# Altium PCB Mazzoleni.PcbDoc
Units mm, origin at the board's own origin, x right, y up, seen from the top; angles counter-clockwise.
Board outline 40 x 88.69 mm, 4 copper layers (Top Layer, Inner 1, Inner 2, Bottom Layer), stack 0.021 mm thick; 8 components, 3 nets, 18 pads, 14 vias.
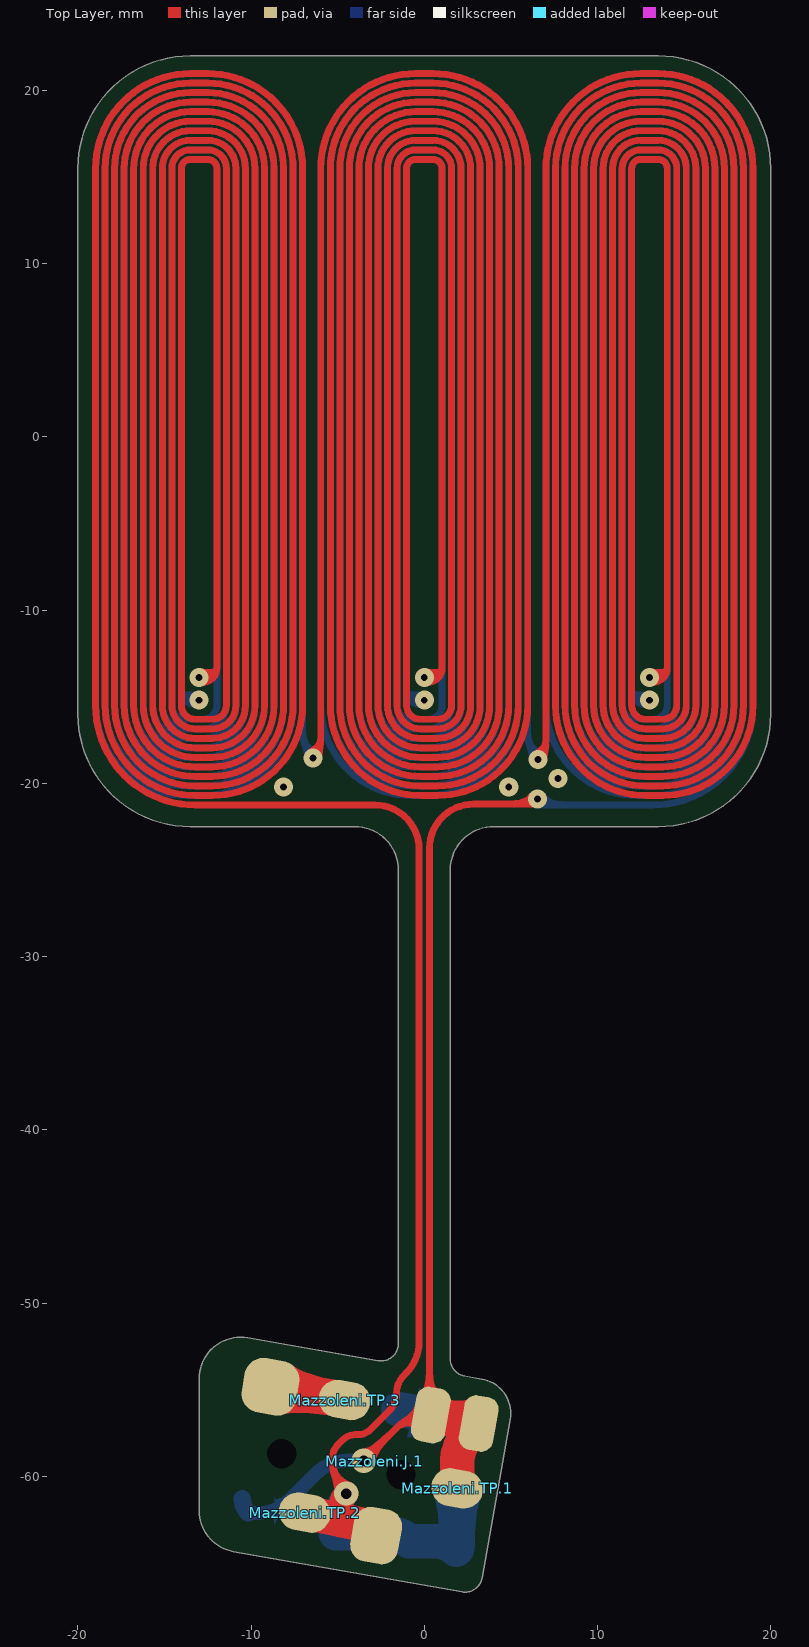
[diagram p0: Top Layer view]
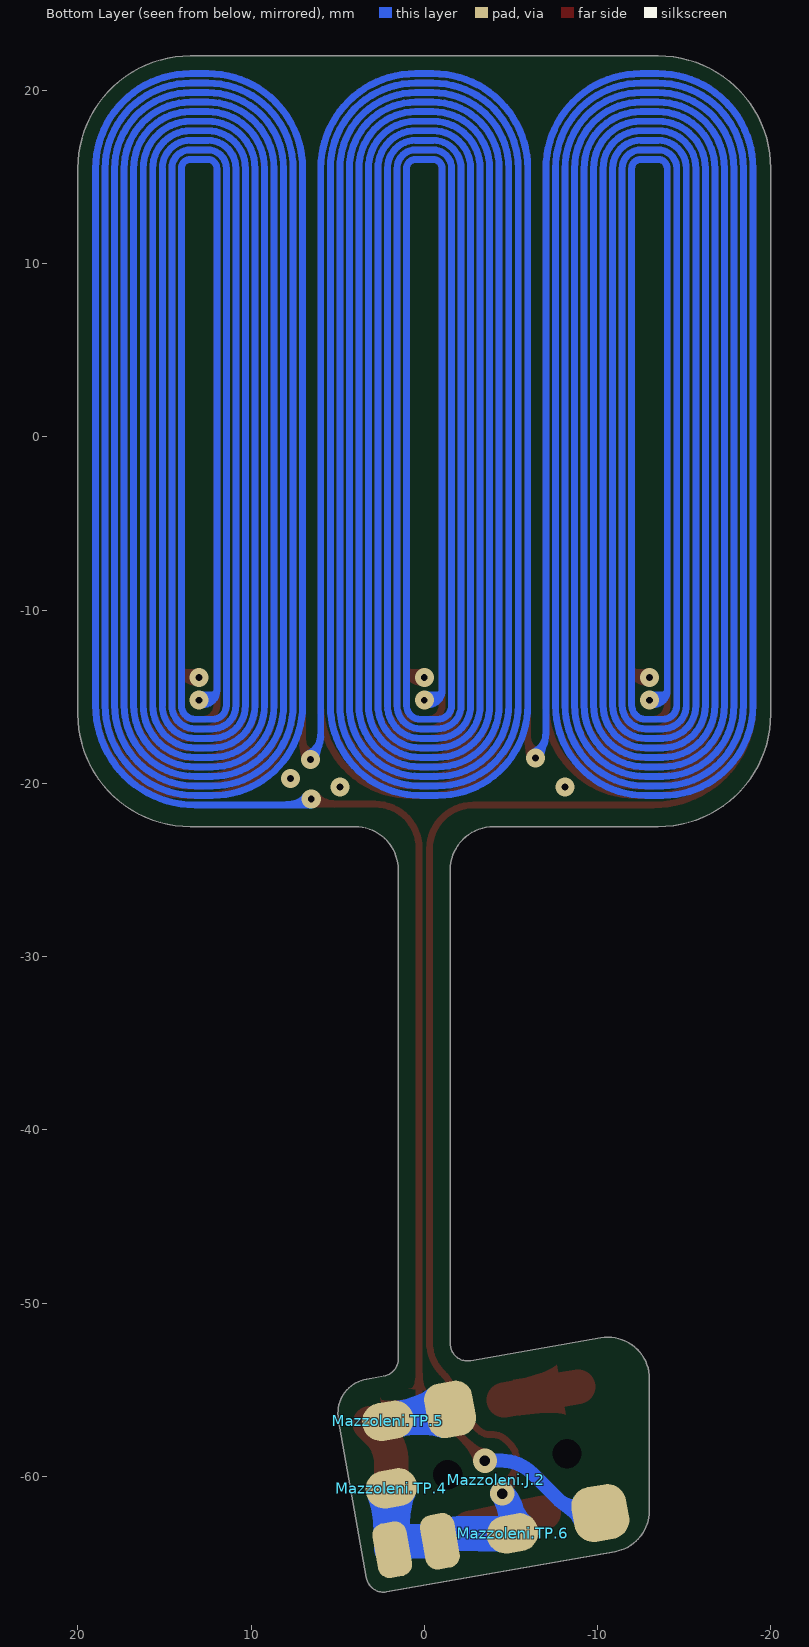
[diagram p1: Bottom Layer view, seen from below]
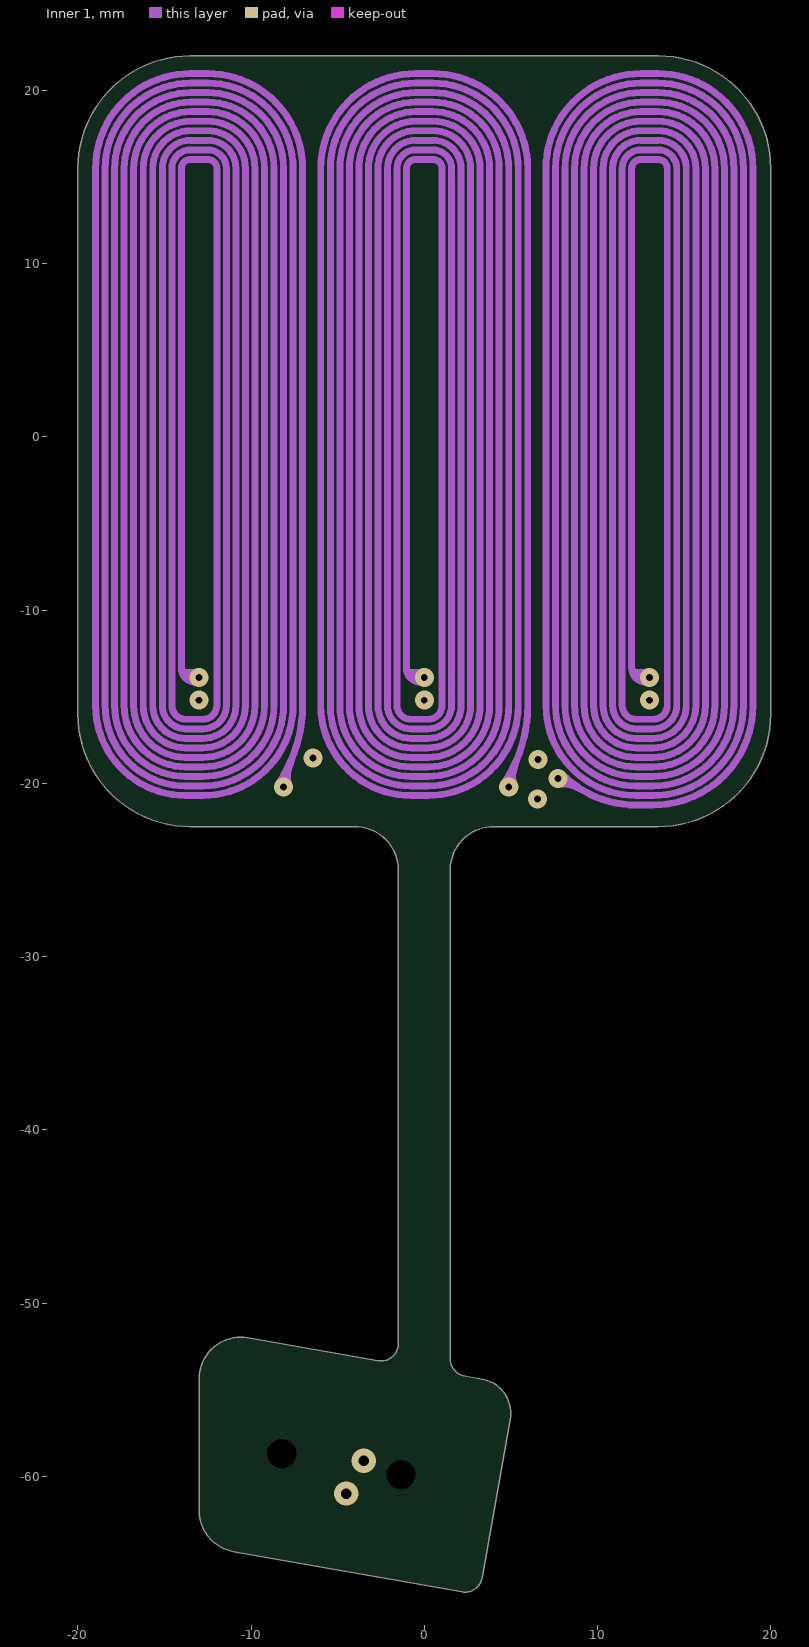
[diagram p2: Inner 1]
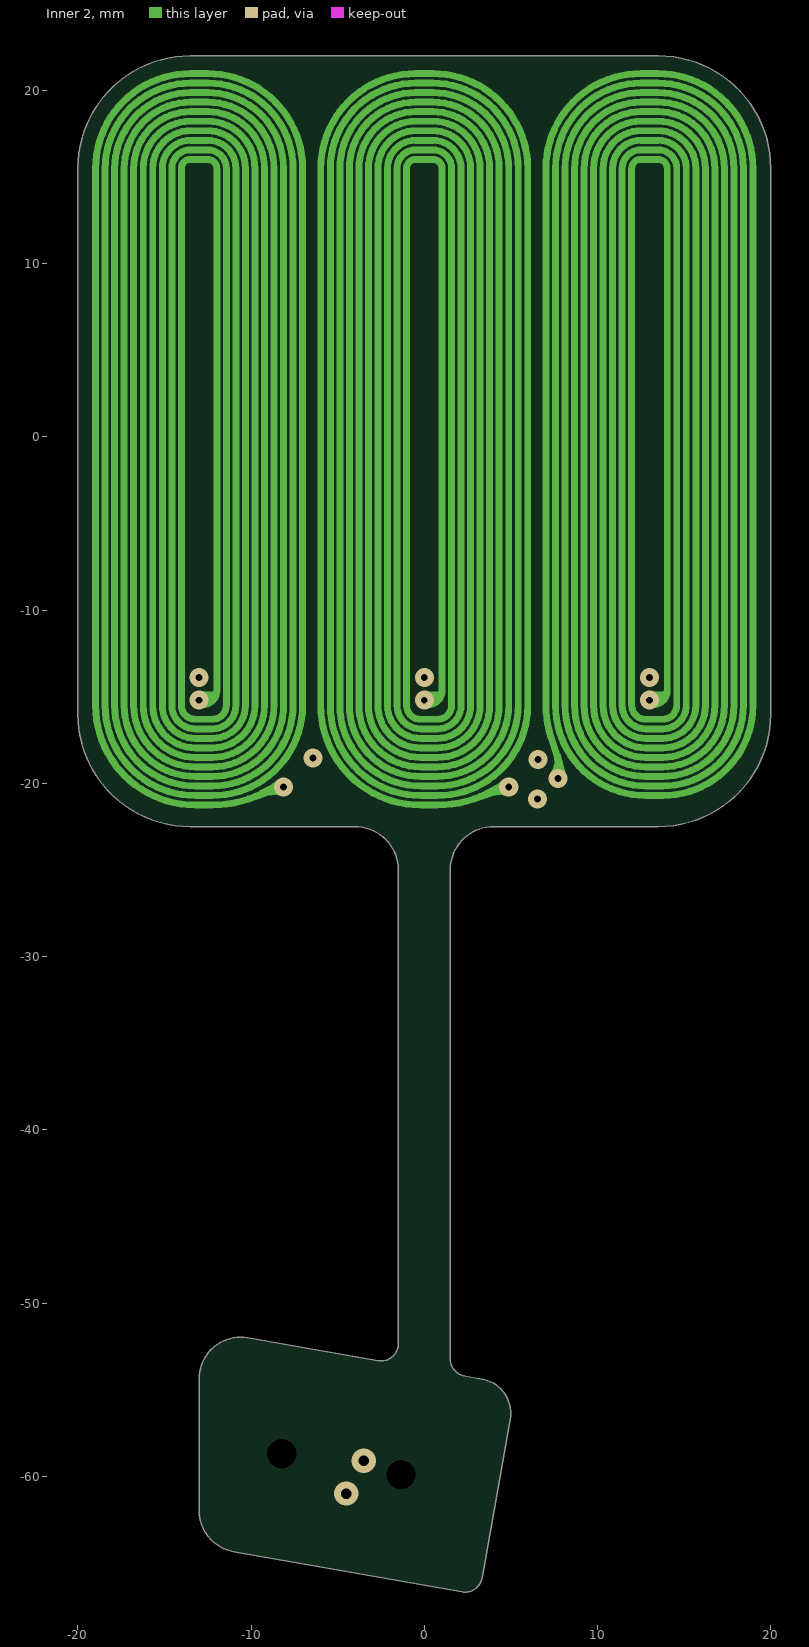
[diagram p3: Inner 2]

## Layer stack, top to bottom
Top Coverlay: solder mask 0.001, Solder Resist, Dk 0
Top Layer: signal copper 0.0045
Dielectric 4: core 0.001, Dk 0
Inner 1: signal copper 0.0045
Dielectric 1: core 0.001, PP-006, Dk 0
Inner 2: signal copper 0.0045
Dielectric 2: core 0.001, PP-006, Dk 0
Bottom Layer: signal copper 0.0045
Bottom Coverlay: solder mask 0.001, Solder Resist, Dk 0

## Board outline
-12.992,-61.987 ccw(c-10.592,-61.987) -11.009,-64.351 2.18,-66.677 ccw(c2.354,-65.692) 3.339,-65.865 3.341,-65.866 4.956,-56.707 ccw(c2.986,-56.36) 3.333,-54.39 2.326,-54.213 cw(c2.5,-53.228) 1.5,-53.228 1.5,-25 cw(c4,-25) 4,-22.5 13.5,-22.5 ccw(c13.5,-16) 20,-16 20,15.5 ccw(c13.5,15.5) 13.5,22 -13.5,22 ccw(c-13.5,15.5) -20,15.5 -20,-16 ccw(c-13.5,-16) -13.5,-22.5 -4,-22.5 cw(c-4,-25) -1.5,-25 -1.5,-52.346 cw(c-2.5,-52.346) -2.674,-53.331 -10.183,-52.007 -10.183,-52.006 ccw(c-10.6,-54.37) -13,-54.37 -13,-61.8

## Design rules (kind name [scope] priority, off if disabled: settings)
BoardOutlineClearance [(Not HasFootprint('SPARKGAP'))] p1: gap=0.4 ignorepadtopadclearanceinfootprint=FALSE except(0: Arc-SplitBarrior Arc-SplitContinuation Track-SplitBarrior Track-SplitContinuation Fill-SplitBarrior Fill-SplitContinuation Poly-SplitBarrior Poly-SplitContinuation Region-SplitBarrior Region-SplitContinuation Text-SplitBarrior Text-SplitContinuation)
Clearance "HighV Pads" [(InNetClass('HighV') AND (IsPad OR IsVia)) vs IsPad OR IsVia] p1: gap=0.4 ignorepadtopadclearanceinfootprint=FALSE except(0: Arc-Hole Track-Hole SMDPad-Hole THPad-Hole Via-Hole Fill-Hole Poly-Hole Region-Hole Text-Hole) // Establishes minimum clearance between bare pads that are high voltage, per IPC2221A Table 6-1, 51-100V, condition A6
Clearance Inter-Pad [IsPad vs IsPad] p2: gap=0.2 ignorepadtopadclearanceinfootprint=FALSE except(0: Arc-Hole Track-Hole SMDPad-Hole THPad-Hole Via-Hole Fill-Hole Poly-Hole Region-Hole Text-Hole)
Clearance "Spark Gaps" [InNetClass('Spark Gap') vs InNet('GND') And InPoly] p3: gap=0.635 ignorepadtopadclearanceinfootprint=FALSE except(0: Arc-Hole Track-Hole SMDPad-Hole THPad-Hole Via-Hole Fill-Hole Poly-Hole Region-Hole Text-Hole)
Clearance FIDs [Name like 'FID*'] p4: gap=1.016 ignorepadtopadclearanceinfootprint=FALSE except(0: Arc-Hole Track-Hole SMDPad-Hole THPad-Hole Via-Hole Fill-Hole Poly-Hole Region-Hole Text-Hole)
Clearance "Inner Planes" [InPoly AND OnMid] p5: gap=0.3 ignorepadtopadclearanceinfootprint=FALSE except(0: Arc-Hole Track-Hole SMDPad-Hole THPad-Hole Via-Hole Fill-Hole Poly-Hole Region-Hole Text-Hole; 0.15: Arc-Arc Arc-Track Track-Track) // Defines a larger clearance for planes on inner layers.
Clearance "All Planes" [InPoly] p6: gap=0.1 ignorepadtopadclearanceinfootprint=FALSE // Defines minimum clearance between planes on the same layer.
Clearance "Inner Layer Clearance" [OnMid vs OnMid] p7: gap=0.3 ignorepadtopadclearanceinfootprint=FALSE except(0: Arc-Hole Track-Hole SMDPad-Hole THPad-Hole Via-Hole Fill-Hole Poly-Hole Region-Hole Text-Hole; 0.15: Arc-Arc Arc-Track Track-Track) // We will give inner layers more spacing because they tend to be subject to stricter process limits.
Clearance [All] p8: gap=0 ignorepadtopadclearanceinfootprint=FALSE except(0.15: Arc-Arc Arc-Track Track-Track; 0.2: Arc-SMDPad Arc-THPad Arc-Via Arc-Text Arc-Hole Track-SMDPad Track-THPad Track-Via Track-Text Track-Hole SMDPad-SMDPad SMDPad-THPad SMDPad-Via SMDPad-Text SMDPad-Hole THPad-THPad THPad-Via THPad-Text THPad-Hole Via-Via Via-Text Fill-Text Poly-Text Region-Text Text-Text Text-Hole)
ComponentClearance "Terminal Block" [(HasFootprint('Phoenix 1933189 - Header')) vs (HasFootprint('Phoenix 1933189 - Header'))] p1: gap=-2.286 collisioncheckmode=3 verticalgap=0.254 showdistances=FALSE
ComponentClearance "FET/TP self Clearance" [(Name like 'Q*') Or (Name like 'TP*') vs (Name like 'Q*') Or (Name like 'TP*')] p2: gap=0.254 collisioncheckmode=3 verticalgap=0.254 showdistances=FALSE
ComponentClearance [Not ((Name like 'H*') Or (Name like 'FID*') Or (Name like 'SP*')) vs Not ((Name like 'H*') Or (Name like 'FID*') Or (Name like 'SP*'))] p3: gap=0.5 collisioncheckmode=3 verticalgap=0.5 showdistances=FALSE
DiffPairsRouting [All] p1: maxlimit=0.508 minlimit=0.279 mostfreqgap=0.381 toplayer_prefgap=0.279 toplayer_minwidth=0.279 toplayer_maxwidth=0.508 toplayer_prefwidth=0.381 midlayer1_mingap=0.305 midlayer1_minwidth=0.305 midlayer1_maxwidth=0.508 midlayer1_prefwidth=0.381 midlayer2_mingap=0.305 midlayer2_minwidth=0.305 midlayer2_maxwidth=0.508 midlayer2_prefwidth=0.381 bottomlayer_prefgap=0.279 bottomlayer_minwidth=0.279 bottomlayer_maxwidth=0.508 bottomlayer_prefwidth=0.381 maxuncoupledlength=12.7
Height [All] p1: minheight=0 maxheight=41 prefheight=12.7
HoleSize [All] p1: absolutevalues=TRUE maxlimit=100 minlimit=0.3 maxpercent=80.000 minpercent=20.000
HoleToHoleClearance [All] p1: gap=0.6 allowstackedmicrovias=TRUE
LayerPairs [All] p1: enforce=FALSE
MinimumSolderMaskSliver [All] p1: minsoldermaskwidth=0.09
NetAntennae [Not (HasFootprint('BALANCE_RESISTOR'))] p1: netantennaetolerance=0
PasteMaskExpansion [All] p1: expansion=-0.025
PlaneClearance [All] p1: clearance=0.3
PlaneConnect [All] p1: pad.planeconnectstyle=Relief pad.reliefexpansion=0.5 pad.reliefentries=4 pad.reliefconductorwidth=0.5 pad.reliefairgap=0.25 via.planeconnectstyle=Direct via.reliefexpansion=0.5 via.reliefentries=4 via.reliefconductorwidth=0.5 via.reliefairgap=0.25
PolygonConnect "PolygonConnect Spark Gap" [HasFootprint('SparkGap')] p1: connectstyle=Direct reliefconductorwidth=0.254 reliefentries=4 polygonreliefangle="90 Angle" airgapwidth=0.254 // This rule makes it so spark gaps get direct connections to ground planes.
PolygonConnect PolygonConnect_GND [All vs InNet('GND')] p2: connectstyle=Direct reliefconductorwidth=0.5 reliefentries=4 polygonreliefangle="90 Angle" airgapwidth=0.25 // This rule specifies all vias and holes connected to a GND plane have direct connections.
PolygonConnect [All] p3: connectstyle=Direct reliefconductorwidth=0.5 reliefentries=4 polygonreliefangle="90 Angle" airgapwidth=0.25
RoutingCorners [All] p1: cornerstyle=45-Degree minsetback=2.5 maxsetback=25
RoutingVias [All] p1: holewidth=0.5 width=1 viastyle="Through Hole" minholewidth=0.2 minwidth=0.5 maxholewidth=5 maxwidth=6
ShortCircuit [Not (InPadClass('TraceResistorPads')) vs Not (InPadClass('TraceResistorPads'))] p1: allowed=FALSE
SilkToBoardRegionClearance [All] p1 off:
SilkToSilkClearance [All] p1 off: silktosilkclearance=0.254
SilkToSolderMaskClearance SilkscreenOverComponentPads [IsPad] p1: minsilkscreentomaskgap=0.102 clearancetoexposedcopper=FALSE
SolderMaskExpansion [All] p1: expansion=0.076 istentingtop=FALSE
Width [All] p1: maxlimit=50.8 minlimit=0.2 preferedwidth=0.4 midlayer1_minwidth=0.35 midlayer2_minwidth=0.35 minimp=50.000000 maximp=50.000000 favimp=50.000000 // Gold Phoenix Flex PCB
14 further rules are at their usual default settings.

## Components (designator, comment, footprint, x,y, rotation, side; value= is the part's Value field where it differs from the comment)
Mazzoleni.J.1 "SJ-43514-SMT-TR" SJ-43514-SMT-TR -4.3,-59.4 r170 top locked (schematic designator J1)
Mazzoleni.J.2 "SJ-43514-SMT-TR" SJ-43514-SMT-TR -4.3,-59.4 r170 bottom locked (schematic designator J2)
Mazzoleni.TP.1 "FlexSolderPad" FlexSolderPad 1.9,-60.7 r260 top (schematic designator TP1)
Mazzoleni.TP.2 "FlexSolderPad" FlexSolderPad -6.9,-62.1 r260 top locked (schematic designator TP2)
Mazzoleni.TP.3 "FlexSolderPad" FlexSolderPad -4.6,-55.6 r260 top (schematic designator TP3)
Mazzoleni.TP.4 "FlexSolderPad" FlexSolderPad 1.9,-60.7 r80 bottom (schematic designator TP4)
Mazzoleni.TP.5 "FlexSolderPad" FlexSolderPad 2.1,-56.8 r80 bottom (schematic designator TP5)
Mazzoleni.TP.6 "FlexSolderPad" FlexSolderPad -5.1,-63.3 r80 bottom locked (schematic designator TP6)

## Footprints (in the part's own frame and the unit in brackets; to place one, negate y for a bottom-side part, rotate by r counter-clockwise, add the part's x,y. Pads: shape width x height; smd on the part's side, far side on the other; paste and mask are expansions set on the pad)
FlexSolderPad [mm]
  oval 2.2x3 smd paste-99 mask-0.5: 1(0,0)
SJ-43514-SMT-TR [mm] "3.50mm (0.141\", 1/8\", Mini Plug) - Headphone Phone Jack Stereo (4 Conductor, TRRS) Connector Solder"
  rrect70% 2x3.2 smd paste-0.05: 1(-6.9,-3.7) 4(-4.1,-3.7)
  rrect70% 3.2x3.2 smd paste-0.05: 2(5.3,-3.7)
  rrect70% 2.8x3.2 smd paste-0.05: 3(-2.2,3.7)
  round 0 hole 1.7: 22(-3,0) 22(4,0)
  body extent -9.2,-4.5 8,4.5, height 5.1

## Part data
Mazzoleni.J.1 Mazzoleni.J.2: "3.50mm (0.141\", 1/8\", Mini Plug) - Headphone Phone Jack Stereo (4 Conductor, TRRS) Connector Solder", Supplier Part Number 1=CP-43514SJCT-ND, Supplier 1=Digi-Key, Supplier 2=Mouser, Supplier Part Number 2=490-SJ-43514-SMT-TR
Mazzoleni.TP.1 Mazzoleni.TP.2 Mazzoleni.TP.3 Mazzoleni.TP.4 Mazzoleni.TP.5 Mazzoleni.TP.6: "Pad designed for soldering a wire to a flex PCB. Reinforced for durability."

## Via types
v1: diameter 1.1, hole 0.4, Top Layer to Bottom Layer, tented both sides, 12 vias
v2: diameter 1.4, hole 0.6, Top Layer to Bottom Layer, tented both sides, 2 vias

## Nets (pads, with @x,y where several pads share a name; then routed paths per layer and width w, separated by ;. In a path a pad name is that pad's centre, name@x,y a point inside that pad or via, vN(x,y) a via of type N, cw(c..) or ccw(c..) an arc to the next point about the centre after c; other vN are vias at no path point)
NetMazzoleni.J.1_1: Mazzoleni.J.1.1 Mazzoleni.J.1.3 Mazzoleni.J.1.4 Mazzoleni.J.2.1 Mazzoleni.J.2.2 Mazzoleni.J.2.4 Mazzoleni.TP.1.1 Mazzoleni.TP.2.1 Mazzoleni.TP.4.1 Mazzoleni.TP.6.1 | length 10042.8
  Top Layer w0.4: -16.775,15.5 -16.775,-15.5 ccw(c-13.225,-15.5) -13.225,-19.05 -12.225,-19.05 ccw(c-12.225,-15.5) -8.675,-15.5 -8.675,15.5 ccw(c-12.5,15.5) -12.5,19.325 -13.5,19.325 ccw(c-13.5,15.5) -17.325,15.5 -17.325,-15.5 ccw(c-13.225,-15.5) -13.225,-19.6 -12.225,-19.6 ccw(c-12.225,-15.5) -8.125,-15.5 -8.125,15.5 ccw(c-12.5,15.5) -12.5,19.875 -13.5,19.875 ccw(c-13.5,15.5) -17.875,15.5 -17.875,-15.5 ccw(c-13.225,-15.5) -13.225,-20.15 -12.225,-20.15 ccw(c-12.225,-15.5) -7.575,-15.5 -7.575,15.5 ccw(c-12.5,15.5) -12.5,20.425 -13.5,20.425 ccw(c-13.5,15.5) -18.425,15.5 -18.425,-15.5 ccw(c-13.225,-15.5) -13.225,-20.7 -12.225,-20.7 ccw(c-12.225,-15.5) -7.025,-15.5 -7.025,15.5 ccw(c-12.5,15.5) -12.5,20.975 -13.5,20.975 ccw(c-13.5,15.5) -18.975,15.5 -18.975,-15.5 ccw(c-13.225,-15.5) -13.225,-21.25 -2.84,-21.25 cw(c-2.84,-23.79) -0.3,-23.79 -0.3,-52.248 cw(c-2.84,-52.248) -1.044,-54.044 -1.176,-54.176 ccw(c-0.151,-55.2) -1.6,-55.2 cw(c-3.049,-55.2) -2.024,-56.224 ; -16.772,15.5 cw(c-13.497,15.5) -13.5,18.775 -12.5,18.775 ; v1@-12.775,-14.15 ccw(c-12.775,-13.35) -11.975,-13.35 -11.975,15.5 ccw(c-12.5,15.5) -12.5,16.025 -13.5,16.025 ccw(c-13.5,15.5) -14.025,15.5 -14.025,-15.5 ccw(c-13.225,-15.5) -13.225,-16.3 -12.225,-16.3 ccw(c-12.225,-15.5) -11.425,-15.5 -11.425,15.5 ccw(c-12.5,15.5) -12.5,16.575 -13.5,16.575 ccw(c-13.5,15.5) -14.575,15.5 -14.575,-15.5 ccw(c-13.225,-15.5) -13.225,-16.85 -12.225,-16.85 ccw(c-12.225,-15.5) -10.875,-15.5 -10.875,15.5 ccw(c-12.5,15.5) -12.5,17.125 -13.5,17.125 ccw(c-13.5,15.5) -15.125,15.5 -15.125,-15.5 ccw(c-13.225,-15.5) -13.225,-17.4 -12.225,-17.4 ccw(c-12.225,-15.5) -10.325,-15.5 -10.325,15.5 ccw(c-12.5,15.5) -12.5,17.675 -13.5,17.675 ccw(c-13.5,15.5) -15.675,15.5 -15.675,-15.5 ccw(c-13.225,-15.5) -13.225,-17.95 -12.225,-17.95 ccw(c-12.225,-15.5) -9.775,-15.5 -9.775,15.5 ccw(c-12.5,15.5) -12.5,18.225 -13.5,18.225 ccw(c-13.5,15.5) -16.225,15.5 -16.225,-15.5 ccw(c-13.225,-15.5) -13.225,-18.5 -12.225,-18.5 ccw(c-12.225,-15.5) -9.225,-15.5 -9.225,15.497 ccw(c-12.5,15.497) -9.225,15.5 ccw(c-12.5,15.497) -12.5,18.772 ; v1(-6.425,-18.525) ccw(c-7.511,-17.439) -5.975,-17.439 -5.975,15.5 cw(c-0.5,15.5) -0.5,20.975 0.5,20.975 cw(c0.5,15.5) 5.975,15.5 5.975,-15.5 cw(c0.775,-15.5) 0.775,-20.7 -0.225,-20.7 cw(c-0.225,-15.5) -5.425,-15.5 -5.425,15.5 cw(c-0.5,15.5) -0.5,20.425 0.5,20.425 cw(c0.5,15.5) 5.425,15.5 5.425,-15.5 cw(c0.775,-15.5) 0.775,-20.15 -0.225,-20.15 cw(c-0.225,-15.5) -4.875,-15.5 -4.875,15.5 cw(c-0.5,15.5) -0.5,19.875 0.5,19.875 cw(c0.5,15.5) 4.875,15.5 4.875,-15.5 cw(c0.775,-15.5) 0.775,-19.6 -0.225,-19.6 cw(c-0.225,-15.5) -4.325,-15.5 -4.325,15.5 cw(c-0.5,15.5) -0.5,19.325 0.5,19.325 cw(c0.5,15.5) 4.325,15.5 4.325,-15.5 cw(c0.775,-15.5) 0.775,-19.05 -0.225,-19.05 cw(c-0.225,-15.5) -3.775,-15.5 -3.775,15.5 ; v2(-4.5,-61) -4.593,-60.907 cw(c-2.886,-59.2) -5.3,-59.2 -5.3,-58.924 cw(c-4.276,-58.924) -5,-58.2 -4.683,-57.883 cw(c-4,-58.566) -4,-57.6 -3.824,-57.6 ccw(c-3.824,-56.576) -3.1,-57.3 -2.024,-56.224 ; -3.772,15.5 cw(c-0.497,15.5) -0.5,18.775 ; v2(-3.5,-59.1) -1.612,-57.212 cw(c0.184,-59.008) 0.184,-56.468 Mazzoleni.J.1.4@0.3,-56.468 ; -0.497,18.775 ccw(c-0.497,15.5) -0.5,18.775 ; v1@0.225,-14.15 ccw(c0.225,-13.35) 1.025,-13.35 1.025,15.5 ccw(c0.5,15.5) 0.5,16.025 -0.5,16.025 ccw(c-0.5,15.5) -1.025,15.5 -1.025,-15.5 ccw(c-0.225,-15.5) -0.225,-16.3 0.775,-16.3 ccw(c0.775,-15.5) 1.575,-15.5 1.575,15.5 ; Mazzoleni.J.1.4 Mazzoleni.J.1.4@0.3,-56.468 ; 0.5,18.772 cw(c0.5,15.497) 3.775,15.5 ; 0.5,18.775 -0.5,18.775 ; 1.575,15.5 ccw(c0.5,15.5) 0.5,16.575 -0.5,16.575 ccw(c-0.5,15.5) -1.575,15.5 -1.575,-15.5 ccw(c-0.225,-15.5) -0.225,-16.85 0.775,-16.85 ccw(c0.775,-15.5) 2.125,-15.5 2.125,15.5 ccw(c0.5,15.5) 0.5,17.125 -0.5,17.125 ccw(c-0.5,15.5) -2.125,15.5 -2.125,-15.5 ccw(c-0.225,-15.5) -0.225,-17.4 0.775,-17.4 ccw(c0.775,-15.5) 2.675,-15.5 2.675,15.5 ccw(c0.5,15.5) 0.5,17.675 -0.5,17.675 ccw(c-0.5,15.5) -2.675,15.5 -2.675,-15.5 ccw(c-0.225,-15.5) -0.225,-17.95 0.775,-17.95 ccw(c0.775,-15.5) 3.225,-15.5 3.225,15.5 ccw(c0.5,15.5) 0.5,18.225 -0.5,18.225 ccw(c-0.5,15.5) -3.225,15.5 -3.225,-15.5 ccw(c-0.225,-15.5) -0.225,-18.5 0.775,-18.5 ccw(c0.775,-15.5) 3.775,-15.5 3.775,15.497 ; v1(6.575,-18.625) ccw(c5.489,-17.539) 7.025,-17.539 7.025,15.5 cw(c12.5,15.5) 12.5,20.975 13.5,20.975 cw(c13.5,15.5) 18.975,15.5 18.975,-15.5 cw(c13.775,-15.5) 13.775,-20.7 12.775,-20.7 cw(c12.775,-15.5) 7.575,-15.5 7.575,15.5 cw(c12.5,15.5) 12.5,20.425 13.5,20.425 cw(c13.5,15.5) 18.425,15.5 18.425,-15.5 cw(c13.775,-15.5) 13.775,-20.15 12.775,-20.15 cw(c12.775,-15.5) 8.125,-15.5 8.125,15.5 cw(c12.5,15.5) 12.5,19.875 13.5,19.875 cw(c13.5,15.5) 17.875,15.5 17.875,-15.5 cw(c13.775,-15.5) 13.775,-19.6 12.775,-19.6 cw(c12.775,-15.5) 8.675,-15.5 8.675,15.5 cw(c12.5,15.5) 12.5,19.325 13.5,19.325 cw(c13.5,15.5) 17.325,15.5 17.325,-15.5 cw(c13.775,-15.5) 13.775,-19.05 12.775,-19.05 cw(c12.775,-15.5) 9.225,-15.5 9.225,15.5 ; v1@6.6,-21.2 2.84,-21.2 ccw(c2.84,-23.74) 0.3,-23.74 Mazzoleni.J.1.4@0.3,-56.468 ; 9.228,15.5 cw(c12.503,15.5) 12.5,18.775 ; 12.503,18.775 ccw(c12.503,15.5) 12.5,18.775 ; v1@13.225,-14.15 ccw(c13.225,-13.35) 14.025,-13.35 14.025,15.5 ccw(c13.5,15.5) 13.5,16.025 12.5,16.025 ccw(c12.5,15.5) 11.975,15.5 11.975,-15.5 ccw(c12.775,-15.5) 12.775,-16.3 13.775,-16.3 ccw(c13.775,-15.5) 14.575,-15.5 14.575,15.5 ccw(c13.5,15.5) 13.5,16.575 12.5,16.575 ccw(c12.5,15.5) 11.425,15.5 11.425,-15.5 ccw(c12.775,-15.5) 12.775,-16.85 13.775,-16.85 ccw(c13.775,-15.5) 15.125,-15.5 15.125,15.5 ccw(c13.5,15.5) 13.5,17.125 12.5,17.125 ccw(c12.5,15.5) 10.875,15.5 10.875,-15.5 ccw(c12.775,-15.5) 12.775,-17.4 13.775,-17.4 ccw(c13.775,-15.5) 15.675,-15.5 15.675,15.5 ccw(c13.5,15.5) 13.5,17.675 12.5,17.675 ccw(c12.5,15.5) 10.325,15.5 10.325,-15.5 ccw(c12.775,-15.5) 12.775,-17.95 13.775,-17.95 ccw(c13.775,-15.5) 16.225,-15.5 16.225,15.5 ccw(c13.5,15.5) 13.5,18.225 12.5,18.225 ccw(c12.5,15.5) 9.775,15.5 9.775,-15.5 ccw(c12.775,-15.5) 12.775,-18.5 13.775,-18.5 ccw(c13.775,-15.5) 16.775,-15.5 16.775,15.497 ccw(c13.5,15.497) 16.775,15.5 ccw(c13.5,15.497) 13.5,18.772 ; 13.5,18.775 12.5,18.775 ; 3.775,15.498 ccw(c0.5,15.497) 3.775,15.5 ; 3.775,15.497 3.775,15.5
  Top Layer w1.4: -4.821,-62.535 -4.821,-61.776 cw(c-3.724,-61.776) v2(-4.5,-61)
  Top Layer w2: Mazzoleni.TP.2.1 -4.821,-62.535 -2.683,-62.983 Mazzoleni.J.1.3@-2.6,-63 ; Mazzoleni.J.1.4 2.743,-56.885 Mazzoleni.J.1.1 2.644,-57.448 ccw(c4.44,-59.244) 1.9,-59.244 Mazzoleni.TP.1.1
  Inner 1 w0.4: v1@-13.225,-14.15 cw(c-13.225,-13.35) -14.025,-13.35 -14.025,15.5 cw(c-13.5,15.5) -13.5,16.025 -12.5,16.025 cw(c-12.5,15.5) -11.975,15.5 -11.975,-15.5 cw(c-12.775,-15.5) -12.775,-16.3 -13.775,-16.3 cw(c-13.775,-15.5) -14.575,-15.5 -14.575,15.5 cw(c-13.5,15.5) -13.5,16.575 -12.5,16.575 cw(c-12.5,15.5) -11.425,15.5 -11.425,-15.5 cw(c-12.775,-15.5) -12.775,-16.85 -13.775,-16.85 cw(c-13.775,-15.5) -15.125,-15.5 -15.125,15.5 cw(c-13.5,15.5) -13.5,17.125 -12.5,17.125 cw(c-12.5,15.5) -10.875,15.5 -10.875,-15.5 cw(c-12.775,-15.5) -12.775,-17.4 -13.775,-17.4 cw(c-13.775,-15.5) -15.675,-15.5 -15.675,15.5 cw(c-13.5,15.5) -13.5,17.675 -12.5,17.675 cw(c-12.5,15.5) -10.325,15.5 -10.325,-15.5 cw(c-12.775,-15.5) -12.775,-17.95 -13.775,-17.95 cw(c-13.775,-15.5) -16.225,-15.5 -16.225,15.5 cw(c-13.5,15.5) -13.5,18.225 -12.5,18.225 cw(c-12.5,15.5) -9.775,15.5 -9.775,-15.5 cw(c-12.775,-15.5) -12.775,-18.5 -13.775,-18.5 cw(c-13.775,-15.5) -16.775,-15.5 -16.775,15.5 cw(c-13.5,15.5) -13.5,18.775 -12.5,18.775 cw(c-12.5,15.5) -9.225,15.5 -9.225,-15.5 cw(c-12.775,-15.5) -12.775,-19.05 -13.775,-19.05 cw(c-13.775,-15.5) -17.325,-15.5 -17.325,15.5 cw(c-13.5,15.5) -13.5,19.325 -12.5,19.325 cw(c-12.5,15.5) -8.675,15.5 -8.675,-15.5 cw(c-12.775,-15.5) -12.775,-19.6 -13.775,-19.6 cw(c-13.775,-15.5) -17.875,-15.5 -17.875,15.5 cw(c-13.5,15.5) -13.5,19.875 -12.5,19.875 cw(c-12.5,15.5) -8.125,15.5 -8.125,-15.5 cw(c-12.775,-15.5) -12.775,-20.15 -13.775,-20.15 cw(c-13.775,-15.5) -18.425,-15.5 -18.425,15.5 cw(c-13.5,15.5) -13.5,20.425 -12.5,20.425 cw(c-12.5,15.5) -7.575,15.5 -7.575,-15.5 cw(c-12.775,-15.5) -12.775,-20.7 -13.775,-20.7 cw(c-13.775,-15.5) -18.975,-15.5 -18.975,15.5 cw(c-13.5,15.5) -13.5,20.975 -12.5,20.975 cw(c-12.5,15.5) -7.025,15.5 -7.025,-15.5 cw(c-15.025,-15.5) v1@-8.393,-19.974 ; v1@-0.225,-14.15 cw(c-0.225,-13.35) -1.025,-13.35 -1.025,15.5 cw(c-0.5,15.5) -0.5,16.025 0.5,16.025 cw(c0.5,15.5) 1.025,15.5 1.025,-15.5 cw(c0.225,-15.5) 0.225,-16.3 -0.775,-16.3 cw(c-0.775,-15.5) -1.575,-15.5 -1.575,15.5 cw(c-0.5,15.5) -0.5,16.575 0.5,16.575 cw(c0.5,15.5) 1.575,15.5 ; 0.225,-16.85 -0.775,-16.85 cw(c-0.775,-15.5) -2.125,-15.5 -2.125,15.5 cw(c-0.5,15.5) -0.5,17.125 0.5,17.125 cw(c0.5,15.5) 2.125,15.5 2.125,-15.5 cw(c0.225,-15.5) 0.225,-17.4 -0.775,-17.4 cw(c-0.775,-15.5) -2.675,-15.5 -2.675,15.5 cw(c-0.5,15.5) -0.5,17.675 0.5,17.675 cw(c0.5,15.5) 2.675,15.5 2.675,-15.5 cw(c0.225,-15.5) 0.225,-17.95 -0.775,-17.95 cw(c-0.775,-15.5) -3.225,-15.5 -3.225,15.5 cw(c-0.5,15.5) -0.5,18.225 0.5,18.225 cw(c0.5,15.5) 3.225,15.5 3.225,-15.5 cw(c0.225,-15.5) 0.225,-18.5 -0.775,-18.5 cw(c-0.775,-15.5) -3.775,-15.5 -3.775,15.5 cw(c-0.5,15.5) -0.5,18.775 0.5,18.775 cw(c0.5,15.5) 3.775,15.5 3.775,-15.5 cw(c0.225,-15.5) 0.225,-19.05 -0.775,-19.05 cw(c-0.775,-15.5) -4.325,-15.5 -4.325,15.5 cw(c-0.5,15.5) -0.5,19.325 0.5,19.325 cw(c0.5,15.5) 4.325,15.5 4.325,-15.5 cw(c0.225,-15.5) 0.225,-19.6 -0.775,-19.6 cw(c-0.775,-15.5) -4.875,-15.5 -4.875,15.5 cw(c-0.5,15.5) -0.5,19.875 0.5,19.875 cw(c0.5,15.5) 4.875,15.5 4.875,-15.5 cw(c0.225,-15.5) 0.225,-20.15 -0.775,-20.15 cw(c-0.775,-15.5) -5.425,-15.5 -5.425,15.5 cw(c-0.5,15.5) -0.5,20.425 0.5,20.425 cw(c0.5,15.5) 5.425,15.5 5.425,-15.5 cw(c0.225,-15.5) 0.225,-20.7 -0.775,-20.7 cw(c-0.775,-15.5) -5.975,-15.5 -5.975,15.5 cw(c-0.5,15.5) -0.5,20.975 0.5,20.975 cw(c0.5,15.5) 5.975,15.5 5.975,-15.5 cw(c-2.025,-15.5) v1@4.607,-19.974 ; 0.225,-16.85 ccw(c0.225,-15.5) 1.575,-15.5 1.575,15.5 ; v1@7.982,-19.493 ccw(c12.225,-15.25) 12.225,-21.25 13.225,-21.25 ccw(c13.225,-15.5) 18.975,-15.5 18.975,15.5 ccw(c13.5,15.5) 13.5,20.975 12.5,20.975 ccw(c12.5,15.5) 7.025,15.5 7.025,-15.5 ccw(c12.225,-15.5) 12.225,-20.7 13.225,-20.7 ccw(c13.225,-15.5) 18.425,-15.5 18.425,15.5 ccw(c13.5,15.5) 13.5,20.425 12.5,20.425 ccw(c12.5,15.5) 7.575,15.5 7.575,-15.5 ccw(c12.225,-15.5) 12.225,-20.15 13.225,-20.15 ccw(c13.225,-15.5) 17.875,-15.5 17.875,15.5 ccw(c13.5,15.5) 13.5,19.875 12.5,19.875 ccw(c12.5,15.5) 8.125,15.5 8.125,-15.5 ccw(c12.225,-15.5) 12.225,-19.6 13.225,-19.6 ccw(c13.225,-15.5) 17.325,-15.5 17.325,15.5 ccw(c13.5,15.5) 13.5,19.325 12.5,19.325 ccw(c12.5,15.5) 8.675,15.5 8.675,-15.5 ccw(c12.225,-15.5) 12.225,-19.05 13.225,-19.05 ccw(c13.225,-15.5) 16.775,-15.5 16.775,15.5 ccw(c13.5,15.5) 13.5,18.775 12.5,18.775 ccw(c12.5,15.5) 9.225,15.5 9.225,-15.5 ccw(c12.225,-15.5) 12.225,-18.5 13.225,-18.5 ccw(c13.225,-15.5) 16.225,-15.5 16.225,15.5 ccw(c13.5,15.5) 13.5,18.225 12.5,18.225 ccw(c12.5,15.5) 9.775,15.5 9.775,-15.5 ccw(c12.225,-15.5) 12.225,-17.95 13.225,-17.95 ccw(c13.225,-15.5) 15.675,-15.5 15.675,15.5 ccw(c13.5,15.5) 13.5,17.675 12.5,17.675 ccw(c12.5,15.5) 10.325,15.5 10.325,-15.5 ccw(c12.225,-15.5) 12.225,-17.4 13.225,-17.4 ccw(c13.225,-15.5) 15.125,-15.5 15.125,15.5 ccw(c13.5,15.5) 13.5,17.125 12.5,17.125 ccw(c12.5,15.5) 10.875,15.5 10.875,-15.5 ccw(c12.225,-15.5) 12.225,-16.85 13.225,-16.85 ccw(c13.225,-15.5) 14.575,-15.5 14.575,15.5 ccw(c13.5,15.5) 13.5,16.575 12.5,16.575 ccw(c12.5,15.5) 11.425,15.5 11.425,-15.5 ccw(c12.225,-15.5) 12.225,-16.3 13.225,-16.3 ccw(c13.225,-15.5) 14.025,-15.5 14.025,15.5 ccw(c13.5,15.5) 13.5,16.025 12.5,16.025 ccw(c12.5,15.5) 11.975,15.5 11.975,-13.35 ccw(c12.775,-13.35) v1@12.775,-14.15
  Inner 2 w0.4: v1@-12.775,-15.45 ccw(c-12.775,-14.65) -11.975,-14.65 -11.975,15.5 ccw(c-12.5,15.5) -12.5,16.025 -13.5,16.025 ccw(c-13.5,15.5) -14.025,15.5 -14.025,-15.5 ccw(c-13.225,-15.5) -13.225,-16.3 -12.225,-16.3 ccw(c-12.225,-15.5) -11.425,-15.5 -11.425,15.5 ccw(c-12.5,15.5) -12.5,16.575 -13.5,16.575 ccw(c-13.5,15.5) -14.575,15.5 -14.575,-15.5 ccw(c-13.225,-15.5) -13.225,-16.85 -12.225,-16.85 ccw(c-12.225,-15.5) -10.875,-15.5 -10.875,15.5 ccw(c-12.5,15.5) -12.5,17.125 -13.5,17.125 ccw(c-13.5,15.5) -15.125,15.5 -15.125,-15.5 ccw(c-13.225,-15.5) -13.225,-17.4 -12.225,-17.4 ccw(c-12.225,-15.5) -10.325,-15.5 -10.325,15.5 ccw(c-12.5,15.5) -12.5,17.675 -13.5,17.675 ccw(c-13.5,15.5) -15.675,15.5 -15.675,-15.5 ccw(c-13.225,-15.5) -13.225,-17.95 -12.225,-17.95 ccw(c-12.225,-15.5) -9.775,-15.5 -9.775,15.5 ccw(c-12.5,15.5) -12.5,18.225 -13.5,18.225 ccw(c-13.5,15.5) -16.225,15.5 -16.225,-15.5 ccw(c-13.225,-15.5) -13.225,-18.5 -12.225,-18.5 ccw(c-12.225,-15.5) -9.225,-15.5 -9.225,15.5 ccw(c-12.5,15.5) -12.5,18.775 -13.5,18.775 ccw(c-13.5,15.5) -16.775,15.5 -16.775,-15.5 ccw(c-13.225,-15.5) -13.225,-19.05 -12.225,-19.05 ccw(c-12.225,-15.5) -8.675,-15.5 -8.675,15.5 ccw(c-12.5,15.5) -12.5,19.325 -13.5,19.325 ccw(c-13.5,15.5) -17.325,15.5 -17.325,-15.5 ccw(c-13.225,-15.5) -13.225,-19.6 -12.225,-19.6 ccw(c-12.225,-15.5) -8.125,-15.5 -8.125,15.5 ccw(c-12.5,15.5) -12.5,19.875 -13.5,19.875 ccw(c-13.5,15.5) -17.875,15.5 -17.875,-15.5 ccw(c-13.225,-15.5) -13.225,-20.15 -12.225,-20.15 ccw(c-12.225,-15.5) -7.575,-15.5 -7.575,15.5 ccw(c-12.5,15.5) -12.5,20.425 -13.5,20.425 ccw(c-13.5,15.5) -18.425,15.5 -18.425,-15.5 ccw(c-13.225,-15.5) -13.225,-20.7 -12.225,-20.7 ccw(c-12.225,-15.5) -7.025,-15.5 -7.025,15.5 ccw(c-12.5,15.5) -12.5,20.975 -13.5,20.975 ccw(c-13.5,15.5) -18.975,15.5 -18.975,-15.5 ccw(c-13.225,-15.5) -13.225,-21.25 -12.225,-21.25 ccw(c-12.225,-14.75) v1@-8.313,-19.941 ; v1@0.225,-15.45 ccw(c0.225,-14.65) 1.025,-14.65 1.025,15.5 ccw(c0.5,15.5) 0.5,16.025 -0.5,16.025 ccw(c-0.5,15.5) -1.025,15.5 -1.025,-15.5 ccw(c-0.225,-15.5) -0.225,-16.3 0.775,-16.3 ccw(c0.775,-15.5) 1.575,-15.5 1.575,15.5 ; 1.575,15.5 ccw(c0.5,15.5) 0.5,16.575 -0.5,16.575 ccw(c-0.5,15.5) -1.575,15.5 -1.575,-15.5 ccw(c-0.225,-15.5) -0.225,-16.85 0.775,-16.85 ccw(c0.775,-15.5) 2.125,-15.5 2.125,15.5 ccw(c0.5,15.5) 0.5,17.125 -0.5,17.125 ccw(c-0.5,15.5) -2.125,15.5 -2.125,-15.5 ccw(c-0.225,-15.5) -0.225,-17.4 0.775,-17.4 ccw(c0.775,-15.5) 2.675,-15.5 2.675,15.5 ccw(c0.5,15.5) 0.5,17.675 -0.5,17.675 ccw(c-0.5,15.5) -2.675,15.5 -2.675,-15.5 ccw(c-0.225,-15.5) -0.225,-17.95 0.775,-17.95 ccw(c0.775,-15.5) 3.225,-15.5 3.225,15.5 ccw(c0.5,15.5) 0.5,18.225 -0.5,18.225 ccw(c-0.5,15.5) -3.225,15.5 -3.225,-15.5 ccw(c-0.225,-15.5) -0.225,-18.5 0.775,-18.5 ccw(c0.775,-15.5) 3.775,-15.5 3.775,15.5 ccw(c0.5,15.5) 0.5,18.775 -0.5,18.775 ccw(c-0.5,15.5) -3.775,15.5 -3.775,-15.5 ccw(c-0.225,-15.5) -0.225,-19.05 0.775,-19.05 ccw(c0.775,-15.5) 4.325,-15.5 4.325,15.5 ccw(c0.5,15.5) 0.5,19.325 -0.5,19.325 ccw(c-0.5,15.5) -4.325,15.5 -4.325,-15.5 ccw(c-0.225,-15.5) -0.225,-19.6 0.775,-19.6 ccw(c0.775,-15.5) 4.875,-15.5 4.875,15.5 ccw(c0.5,15.5) 0.5,19.875 -0.5,19.875 ccw(c-0.5,15.5) -4.875,15.5 -4.875,-15.5 ccw(c-0.225,-15.5) -0.225,-20.15 0.775,-20.15 ccw(c0.775,-15.5) 5.425,-15.5 5.425,15.5 ccw(c0.5,15.5) 0.5,20.425 -0.5,20.425 ccw(c-0.5,15.5) -5.425,15.5 -5.425,-15.5 ccw(c-0.225,-15.5) -0.225,-20.7 0.775,-20.7 ccw(c0.775,-15.5) 5.975,-15.5 5.975,15.5 ccw(c0.5,15.5) 0.5,20.975 -0.5,20.975 ccw(c-0.5,15.5) -5.975,15.5 -5.975,-15.5 ccw(c-0.225,-15.5) -0.225,-21.25 0.775,-21.25 ccw(c0.775,-14.75) v1@4.687,-19.941 ; v1(7.725,-19.73) v1(7.725,-19.73) ccw(c5.182,-19.17) 7.655,-18.356 7.33,-17.364 7.31,-17.319 cw(c7.676,-17.159) 7.295,-17.279 cw(c13.025,-15.5) 7.025,-15.5 7.025,15.5 cw(c12.5,15.5) 12.5,20.975 13.5,20.975 cw(c13.5,15.5) 18.975,15.5 18.975,-15.5 cw(c13.775,-15.5) 13.775,-20.7 12.775,-20.7 cw(c12.775,-15.5) 8.47,-18.417 cw(c12.775,-15.5) 7.575,-15.5 7.575,15.5 cw(c12.5,15.5) 12.5,20.425 13.5,20.425 cw(c13.5,15.5) 18.425,15.5 18.425,-15.5 cw(c13.775,-15.5) 13.775,-20.15 12.775,-20.15 cw(c12.775,-15.5) 8.125,-15.5 8.125,15.5 cw(c12.5,15.5) 12.5,19.875 13.5,19.875 cw(c13.5,15.5) 17.875,15.5 17.875,-15.5 cw(c13.775,-15.5) 13.775,-19.6 12.775,-19.6 cw(c12.775,-15.5) 8.675,-15.5 8.675,15.5 cw(c12.5,15.5) 12.5,19.325 13.5,19.325 cw(c13.5,15.5) 17.325,15.5 17.325,-15.5 cw(c13.775,-15.5) 13.775,-19.05 12.775,-19.05 cw(c12.775,-15.5) 9.225,-15.5 9.225,15.5 cw(c12.5,15.5) 12.5,18.775 13.5,18.775 cw(c13.5,15.5) 16.775,15.5 16.775,-15.5 cw(c13.775,-15.5) 13.775,-18.5 12.775,-18.5 cw(c12.775,-15.5) 9.775,-15.5 9.775,15.5 cw(c12.5,15.5) 12.5,18.225 13.5,18.225 cw(c13.5,15.5) 16.225,15.5 16.225,-15.5 cw(c13.775,-15.5) 13.775,-17.95 12.775,-17.95 cw(c12.775,-15.5) 10.325,-15.5 10.325,15.5 cw(c12.5,15.5) 12.5,17.675 13.5,17.675 cw(c13.5,15.5) 15.675,15.5 15.675,-15.5 cw(c13.775,-15.5) 13.775,-17.4 12.775,-17.4 cw(c12.775,-15.5) 10.875,-15.5 10.875,15.5 cw(c12.5,15.5) 12.5,17.125 13.5,17.125 cw(c13.5,15.5) 15.125,15.5 15.125,-15.5 cw(c13.775,-15.5) 13.775,-16.85 12.775,-16.85 cw(c12.775,-15.5) 11.425,-15.5 11.425,15.5 cw(c12.5,15.5) 12.5,16.575 13.5,16.575 cw(c13.5,15.5) 14.575,15.5 14.575,-15.5 cw(c13.775,-15.5) 13.775,-16.3 12.775,-16.3 cw(c12.775,-15.5) 11.975,-15.5 11.975,15.5 cw(c12.5,15.5) 12.5,16.025 13.5,16.025 cw(c13.5,15.5) 14.025,15.5 14.025,-14.65 cw(c13.225,-14.65) v1@13.225,-15.45
  Bottom Layer w0.4: v1@-13.225,-15.45 cw(c-13.225,-14.65) -14.025,-14.65 -14.025,15.5 cw(c-13.5,15.5) -13.5,16.025 -12.5,16.025 cw(c-12.5,15.5) -11.975,15.5 -11.975,-15.5 cw(c-12.775,-15.5) -12.775,-16.3 -13.775,-16.3 cw(c-13.775,-15.5) -14.575,-15.5 -14.575,15.5 cw(c-13.5,15.5) -13.5,16.575 -12.5,16.575 cw(c-12.5,15.5) -11.425,15.5 -11.425,-15.5 cw(c-12.775,-15.5) -12.775,-16.85 -13.775,-16.85 cw(c-13.775,-15.5) -15.125,-15.5 -15.125,15.5 cw(c-13.5,15.5) -13.5,17.125 -12.5,17.125 cw(c-12.5,15.5) -10.875,15.5 -10.875,-15.5 cw(c-12.775,-15.5) -12.775,-17.4 -13.775,-17.4 cw(c-13.775,-15.5) -15.675,-15.5 -15.675,15.5 cw(c-13.5,15.5) -13.5,17.675 -12.5,17.675 cw(c-12.5,15.5) -10.325,15.5 -10.325,-15.5 cw(c-12.775,-15.5) -12.775,-17.95 -13.775,-17.95 cw(c-13.775,-15.5) -16.225,-15.5 -16.225,15.5 cw(c-13.5,15.5) -13.5,18.225 -12.5,18.225 cw(c-12.5,15.5) -9.775,15.5 -9.775,-15.5 cw(c-12.775,-15.5) -12.775,-18.5 -13.775,-18.5 cw(c-13.775,-15.5) -16.775,-15.5 -16.775,15.5 cw(c-13.5,15.5) -13.5,18.775 -12.5,18.775 cw(c-12.5,15.5) -9.225,15.5 -9.225,-15.5 cw(c-12.775,-15.5) -12.775,-19.05 -13.775,-19.05 cw(c-13.775,-15.5) -17.325,-15.5 -17.325,15.5 cw(c-13.5,15.5) -13.5,19.325 -12.5,19.325 cw(c-12.5,15.5) -8.675,15.5 -8.675,-15.5 cw(c-12.775,-15.5) -12.775,-19.6 -13.775,-19.6 cw(c-13.775,-15.5) -17.875,-15.5 -17.875,15.5 cw(c-13.5,15.5) -13.5,19.875 -12.5,19.875 cw(c-12.5,15.5) -8.125,15.5 -8.125,-15.5 cw(c-12.775,-15.5) -12.775,-20.15 -13.775,-20.15 cw(c-13.775,-15.5) -18.425,-15.5 -18.425,15.5 cw(c-13.5,15.5) -13.5,20.425 -12.5,20.425 cw(c-12.5,15.5) -7.575,15.5 -7.575,-15.5 cw(c-12.775,-15.5) -12.775,-20.7 -13.775,-20.7 cw(c-13.775,-15.5) -18.975,-15.5 -18.975,15.5 cw(c-13.5,15.5) -13.5,20.975 -12.5,20.975 cw(c-12.5,15.5) -7.025,15.5 -7.025,-16.4 -7.025,-17.076 ccw(c-4.976,-17.076) v1(-6.425,-18.525) ; v1@-0.225,-15.45 cw(c-0.225,-14.65) -1.025,-14.65 -1.025,15.5 cw(c-0.5,15.5) -0.5,16.025 0.5,16.025 cw(c0.5,15.5) 1.025,15.5 1.025,-15.5 cw(c0.225,-15.5) 0.225,-16.3 ; 0.225,-20.15 -0.775,-20.15 cw(c-0.775,-15.5) -5.425,-15.5 -5.425,15.5 cw(c-0.5,15.5) -0.5,20.425 0.5,20.425 cw(c0.5,15.5) 5.425,15.5 5.425,-15.5 cw(c0.225,-15.5) 0.225,-20.7 -0.775,-20.7 cw(c-0.775,-15.5) -5.975,-15.5 -5.975,15.5 cw(c-0.5,15.5) -0.5,20.975 0.5,20.975 cw(c0.5,15.5) 5.975,15.5 5.975,-16.7 5.975,-17.176 ; 0.225,-19.6 -0.775,-19.6 cw(c-0.775,-15.5) -4.875,-15.5 -4.875,15.5 cw(c-0.5,15.5) -0.5,19.875 0.5,19.875 cw(c0.5,15.5) 4.875,15.5 4.875,-15.5 cw(c0.225,-15.5) 0.225,-20.15 ; 0.225,-19.05 -0.775,-19.05 cw(c-0.775,-15.5) -4.325,-15.5 -4.325,15.5 cw(c-0.5,15.5) -0.5,19.325 0.5,19.325 cw(c0.5,15.5) 4.325,15.5 4.325,-15.5 cw(c0.225,-15.5) 0.225,-19.6 ; 0.225,-18.5 -0.775,-18.5 cw(c-0.775,-15.5) -3.775,-15.5 -3.775,15.5 cw(c-0.5,15.5) -0.5,18.775 0.5,18.775 cw(c0.5,15.5) 3.775,15.5 3.775,-15.5 cw(c0.225,-15.5) 0.225,-19.05 ; 0.225,-17.95 -0.775,-17.95 cw(c-0.775,-15.5) -3.225,-15.5 -3.225,15.5 cw(c-0.5,15.5) -0.5,18.225 0.5,18.225 cw(c0.5,15.5) 3.225,15.5 3.225,-15.5 cw(c0.225,-15.5) 0.225,-18.5 ; 0.225,-17.4 -0.775,-17.4 cw(c-0.775,-15.5) -2.675,-15.5 -2.675,15.5 cw(c-0.5,15.5) -0.5,17.675 0.5,17.675 cw(c0.5,15.5) 2.675,15.5 2.675,-15.5 cw(c0.225,-15.5) 0.225,-17.95 ; 0.225,-16.85 -0.775,-16.85 cw(c-0.775,-15.5) -2.125,-15.5 -2.125,15.5 cw(c-0.5,15.5) -0.5,17.125 0.5,17.125 cw(c0.5,15.5) 2.125,15.5 2.125,-15.5 cw(c0.225,-15.5) 0.225,-17.4 ; 0.225,-16.3 -0.775,-16.3 cw(c-0.775,-15.5) -1.575,-15.5 -1.575,15.5 cw(c-0.5,15.5) -0.5,16.575 0.5,16.575 cw(c0.5,15.5) 1.575,15.5 ; 0.225,-16.85 ccw(c0.225,-15.5) 1.575,-15.5 1.575,15.5 ; 5.975,-17.177 ccw(c8.024,-17.176) v1(6.575,-18.625) ; v1@6.5,-21.25 13.225,-21.25 ccw(c13.225,-15.5) 18.975,-15.5 18.975,15.5 ccw(c13.5,15.5) 13.5,20.975 12.5,20.975 ccw(c12.5,15.5) 7.025,15.5 7.025,-15.5 ccw(c12.225,-15.5) 12.225,-20.7 13.225,-20.7 ccw(c13.225,-15.5) 18.425,-15.5 18.425,15.5 ccw(c13.5,15.5) 13.5,20.425 12.5,20.425 ccw(c12.5,15.5) 7.575,15.5 7.575,-15.5 ccw(c12.225,-15.5) 12.225,-20.15 13.225,-20.15 ccw(c13.225,-15.5) 17.875,-15.5 17.875,15.5 ccw(c13.5,15.5) 13.5,19.875 12.5,19.875 ccw(c12.5,15.5) 8.125,15.5 8.125,-15.5 ccw(c12.225,-15.5) 12.225,-19.6 13.225,-19.6 ccw(c13.225,-15.5) 17.325,-15.5 17.325,15.5 ccw(c13.5,15.5) 13.5,19.325 12.5,19.325 ccw(c12.5,15.5) 8.675,15.5 8.675,-15.5 ccw(c12.225,-15.5) 12.225,-19.05 13.225,-19.05 ccw(c13.225,-15.5) 16.775,-15.5 16.775,15.5 ccw(c13.5,15.5) 13.5,18.775 12.5,18.775 ccw(c12.5,15.5) 9.225,15.5 9.225,-15.5 ccw(c12.225,-15.5) 12.225,-18.5 13.225,-18.5 ccw(c13.225,-15.5) 16.225,-15.5 16.225,15.5 ccw(c13.5,15.5) 13.5,18.225 12.5,18.225 ccw(c12.5,15.5) 9.775,15.5 9.775,-15.5 ccw(c12.225,-15.5) 12.225,-17.95 13.225,-17.95 ccw(c13.225,-15.5) 15.675,-15.5 15.675,15.5 ccw(c13.5,15.5) 13.5,17.675 12.5,17.675 ccw(c12.5,15.5) 10.325,15.5 10.325,-15.5 ccw(c12.225,-15.5) 12.225,-17.4 13.225,-17.4 ccw(c13.225,-15.5) 15.125,-15.5 15.125,15.5 ccw(c13.5,15.5) 13.5,17.125 12.5,17.125 ccw(c12.5,15.5) 10.875,15.5 10.875,-15.5 ccw(c12.225,-15.5) 12.225,-16.85 13.225,-16.85 ccw(c13.225,-15.5) 14.575,-15.5 14.575,15.5 ccw(c13.5,15.5) 13.5,16.575 12.5,16.575 ccw(c12.5,15.5) 11.425,15.5 11.425,-15.5 ccw(c12.225,-15.5) 12.225,-16.3 13.225,-16.3 ccw(c13.225,-15.5) 14.025,-15.5 14.025,15.5 ccw(c13.5,15.5) 13.5,16.025 12.5,16.025 ccw(c12.5,15.5) 11.975,15.5 11.975,-14.65 ccw(c12.775,-14.65) v1@12.775,-15.45
  Bottom Layer w0.8: Mazzoleni.J.2.2 -9.576,-62.123 ccw(c-9.576,-59.583) -7.78,-61.38 -6.244,-59.844 cw(c-4.448,-61.64) -4.448,-59.1 v2(-3.5,-59.1)
  Bottom Layer w1: Mazzoleni.J.2.2@-10.5,-61.307 ccw(c-9.346,-61.307) Mazzoleni.J.2.2
  Bottom Layer w1.4: Mazzoleni.TP.6.1 -5.1,-62.449 cw(c-3.051,-62.449) v2(-4.5,-61)
  Bottom Layer w2: Mazzoleni.TP.6.1 -2.005,-63.3 cw(c-2.005,-64.856) Mazzoleni.J.2.4 0.679,-63.756 cw(c0.679,-65.416) Mazzoleni.J.2.1 ccw(c1.738,-64.128) 1.9,-64.128 Mazzoleni.TP.4.1
  other v1: 6.524,-20.9 -8.125,-20.205 4.875,-20.205 -13,-15.2 0,-15.2 13,-15.2 -13,-13.9 0,-13.9 13,-13.9
NetMazzoleni.J.1_2: Mazzoleni.J.1.2 Mazzoleni.TP.3.1 | length 4.3
  Top Layer w2: Mazzoleni.J.1.2 Mazzoleni.TP.3.1
NetMazzoleni.J.2_3: Mazzoleni.J.2.3 Mazzoleni.TP.5.1 | length 3.7
  Bottom Layer w2: Mazzoleni.J.2.3 Mazzoleni.TP.5.1
pads on no net: Mazzoleni.J.1.22 Mazzoleni.J.2.22

## Silkscreen, mask and mechanical layers (free items; w line width, h text height)
Board Outline:
  lines w0.2: -2.674,-53.331 -10.183,-52.007 ccw(c-10.6,-54.37) -13,-54.37 -13,-61.8 -12.992,-61.987 ccw(c-10.592,-61.987) -11.009,-64.351 2.18,-66.677 ccw(c2.354,-65.692) 3.339,-65.865 ; -2.674,-53.331 ccw(c-2.5,-52.346) -1.5,-52.346 -1.5,-25 ccw(c-4,-25) -4,-22.5 -13.5,-22.5 cw(c-13.5,-16) -20,-16 -20,15.5 cw(c-13.5,15.5) -13.5,22 13.5,22 cw(c13.5,15.5) 20,15.5 20,-16 cw(c13.5,-16) 13.5,-22.5 4,-22.5 ccw(c4,-25) 1.5,-25 1.5,-53.228 ccw(c2.5,-53.228) 2.326,-54.213 3.333,-54.39 cw(c2.986,-56.36) 4.956,-56.707 3.341,-65.866
Layout Guides:
  lines w0.1: 0,-52 0,0
  lines w0.2: -19,-15 -19,15 -14,15 -14,-15 -19,-15 ; -12,-15 -12,15 -7,15 -7,-15 -12,-15 ; -6,-15 -6,15 -1,15 -1,-15 -6,-15 ; 1,-15 1,15 6,15 6,-15 1,-15 ; 7,-15 7,15 12,15 12,-15 7,-15 ; 14,-15 14,15 19,15 19,-15 14,-15